# Altium PCB DM0250.PcbDoc (part 2 of 2)
Units mm, origin at the board's own origin, x right, y up, seen from the top; angles counter-clockwise.
Board outline 25 x 23.86 mm, 4 copper layers (Top Copper, Signal Layer 1, Layer 1, Bottom Layer), stack 1.602 mm thick; 45 components, 21 nets, 142 pads, 71 vias.
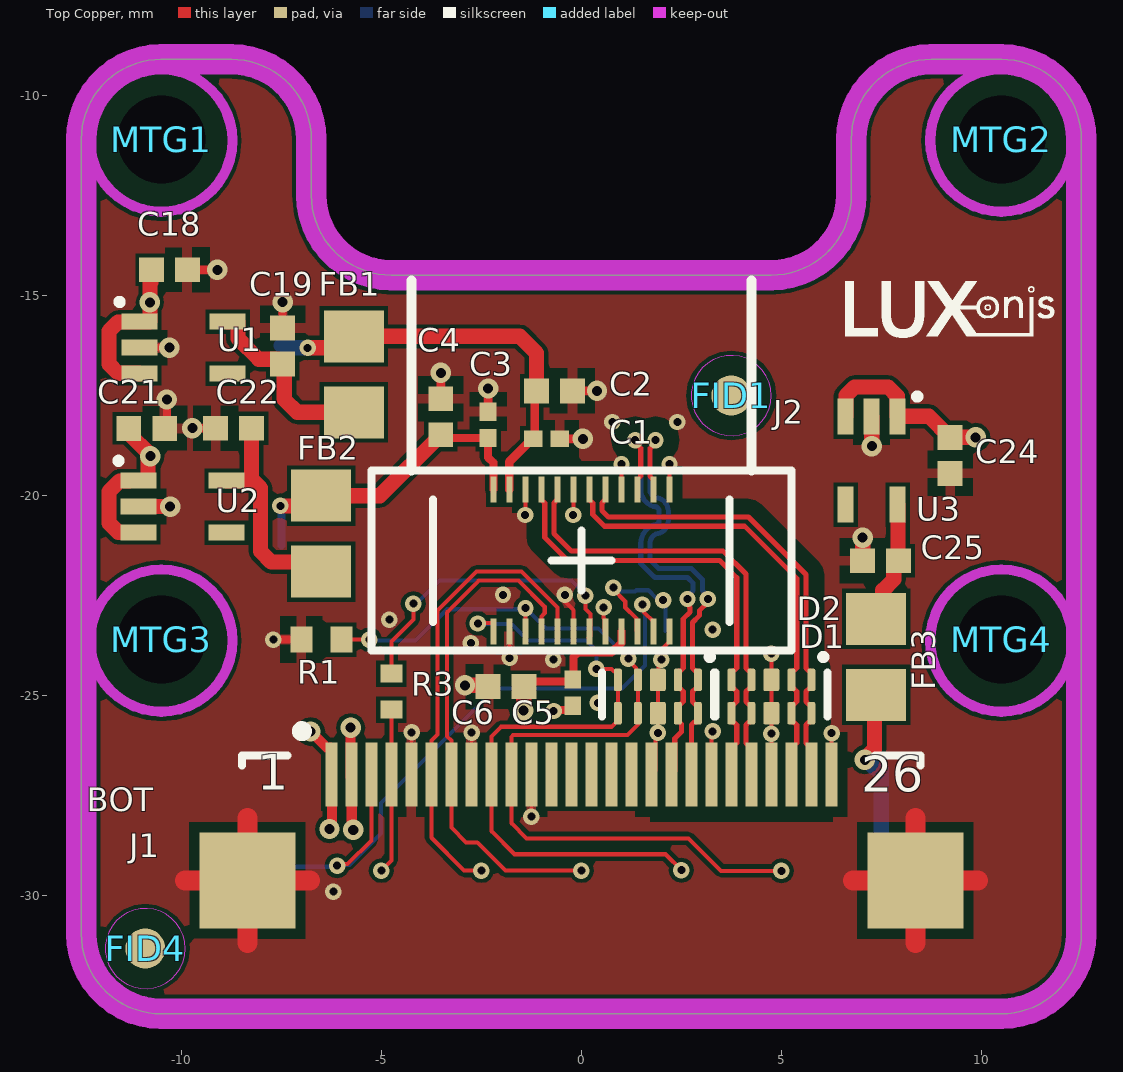
[diagram p0: Top Copper view]

## Silkscreen, mask and mechanical layers (free items; w line width, h text height) (continued)
Bottom Overlay: (continued)
  text "2.8V" at 7.324,-28.426 h1.02 r270
  text "GND" at -4.052,-30.925 h1.02 r270
  text "GND" at -1.552,-30.925 h1.02 r270
  text "GND" at 0.948,-30.925 h1.02 r270
  text "GND" at 3.448,-30.925 h1.02 r270
  text "SDA" at -2.8,-32 h1.02 r270
  text "SCL" at -0.3,-32 h1.02 r270
  text "CLK" at 2.2,-32 h1.02 r270
Board:
  lines w0.025: -8.75,-9.094 cw(c-8.75,-11.094) -6.75,-11.094 -6.75,-12.49 ccw(c-4.75,-12.49) -4.75,-14.49 4.75,-14.49 ccw(c4.75,-12.49) 6.75,-12.49 6.75,-11.094 cw(c8.75,-11.094) 8.75,-9.094 ; -8.745,-9.094 -10.5,-9.094 ccw(c-10.5,-11.094) -12.5,-11.094 -12.5,-30.956 ccw(c-10.5,-30.956) -10.5,-32.956 10.5,-32.956 ccw(c10.5,-30.956) 12.5,-30.956 12.5,-11.1 ; 8.745,-9.094 10.5,-9.094 cw(c10.5,-11.094) 12.5,-11.094

## Text inside footprints (layer, text, board x,y; h text height)
J1: Top Overlay "26" at 7,-27.701 h1.52; Top Overlay "1" at -8.1,-27.651 h1.52
J2: Bottom Assembly "Board edge" at -1.1,-14.635 h0.5 r180; Bottom Assembly "Flex edge" at -0.9,-13.235 h0.5 r180; Top Assembly "Board edge" at 1.1,-14.635 h0.5 r180; Top Assembly "Flex edge" at 0.9,-13.235 h0.5 r180